# Altium PCB Mic_PCB.PcbDoc
Units mm, origin at the board's own origin, x right, y up, seen from the top; angles counter-clockwise.
Board outline 26.7 x 33.2 mm, 4 copper layers (Top Layer, Internal Plane 1, Internal Plane 2, Bottom Layer), stack 0.462 mm thick; 14 components, 9 nets, 53 pads, 0 vias.
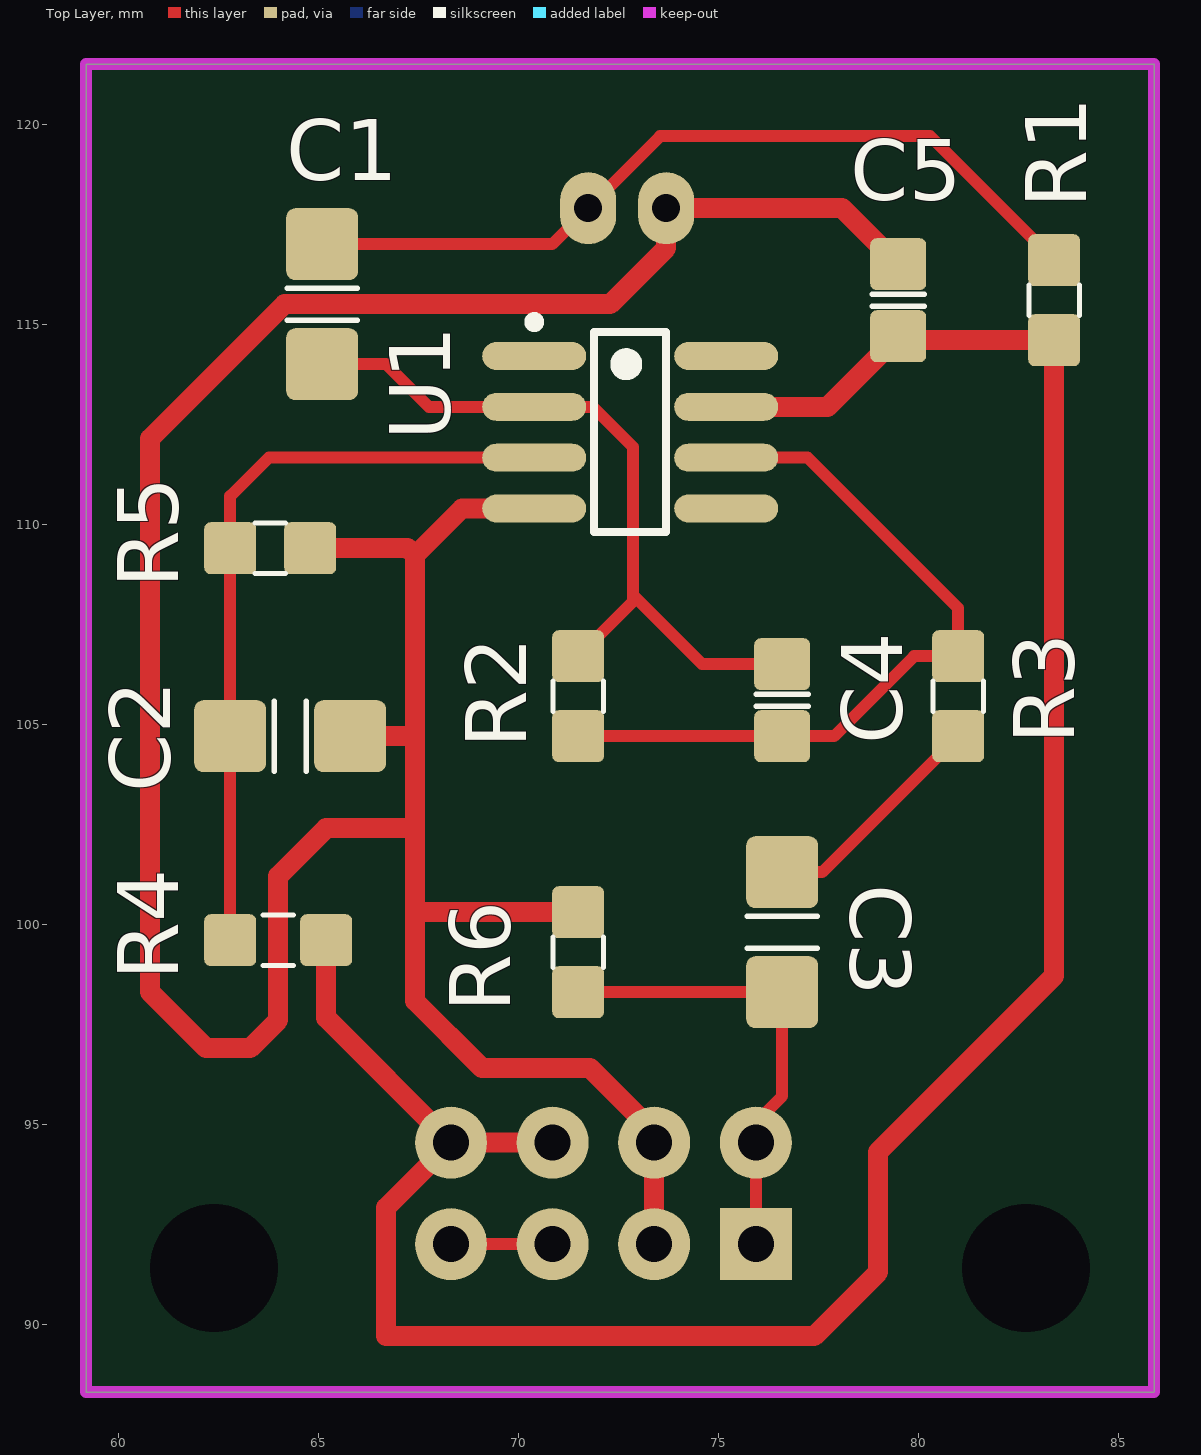
[diagram p0: Top Layer view]
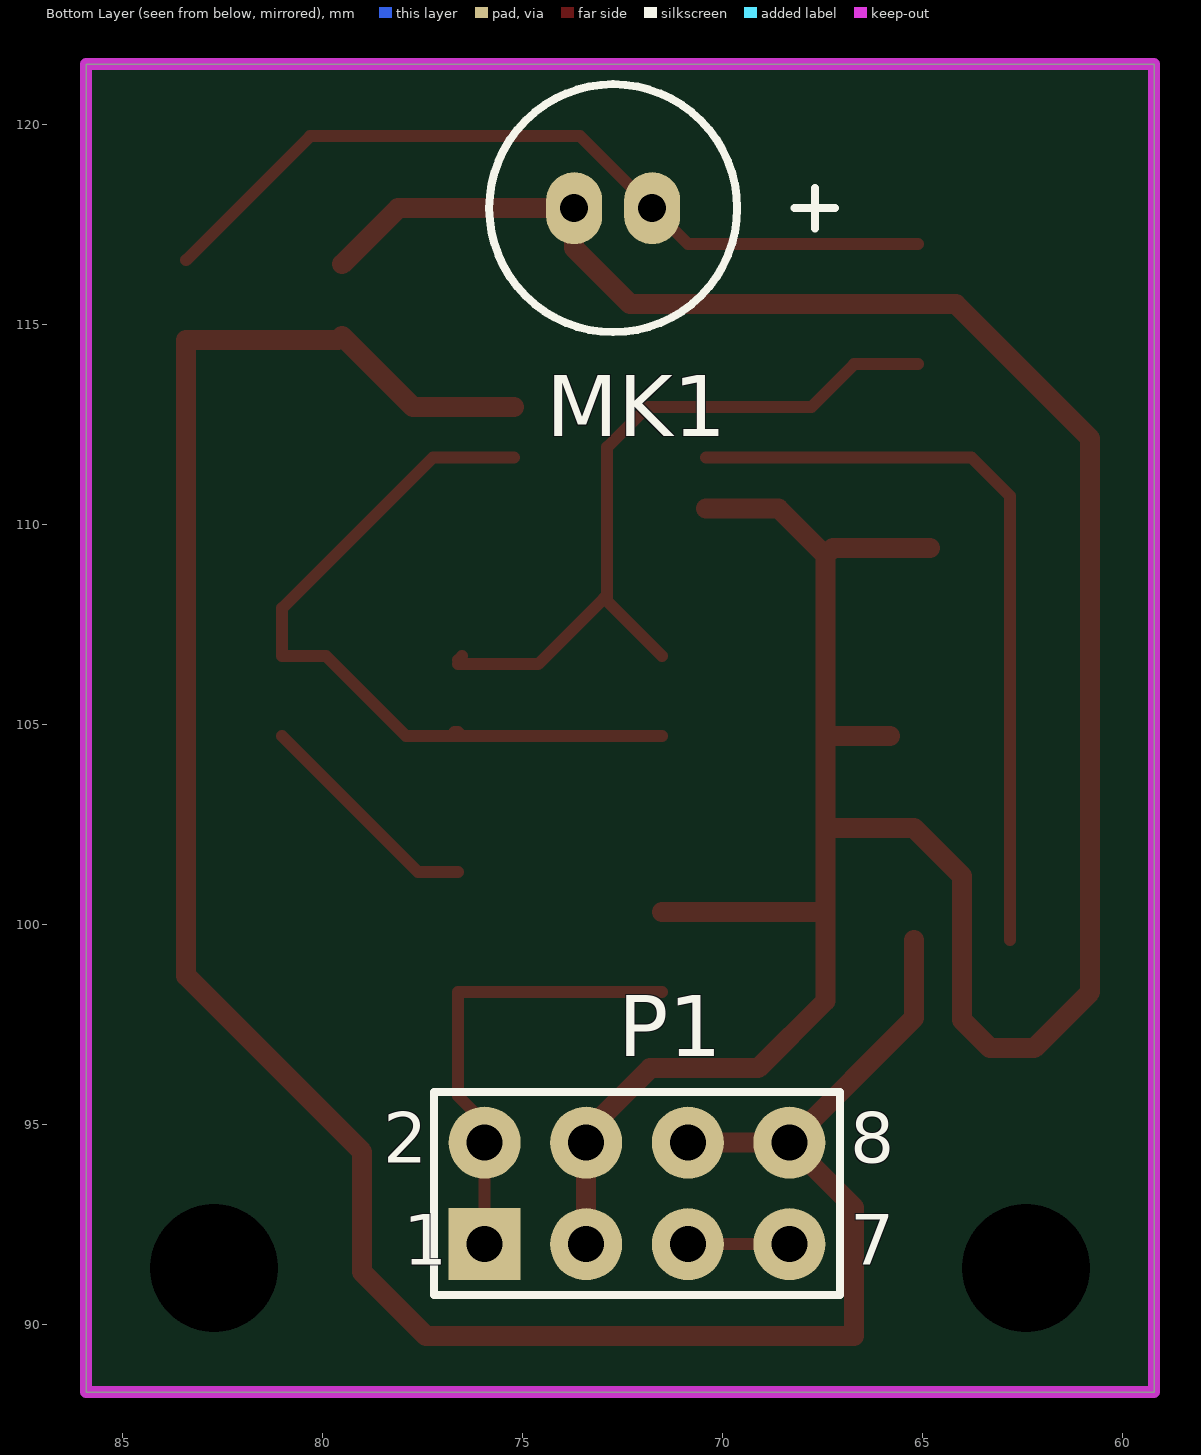
[diagram p1: Bottom Layer view, seen from below]
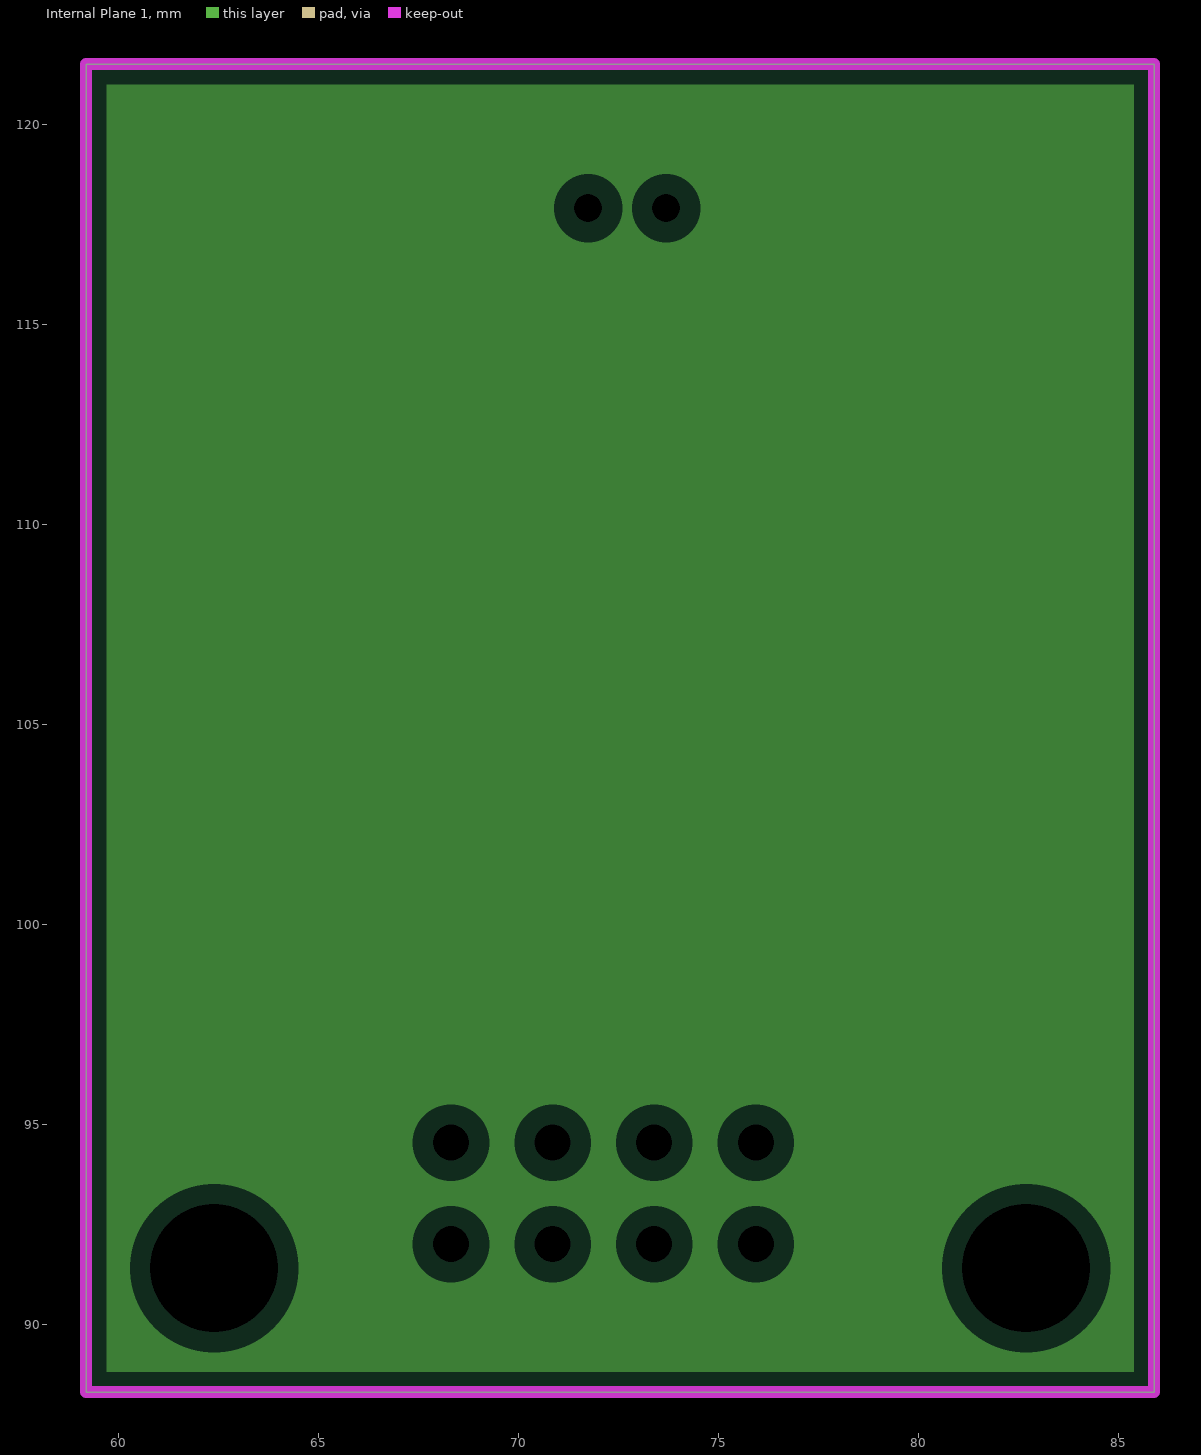
[diagram p2: Internal Plane 1, clearances drawn from the general rule]
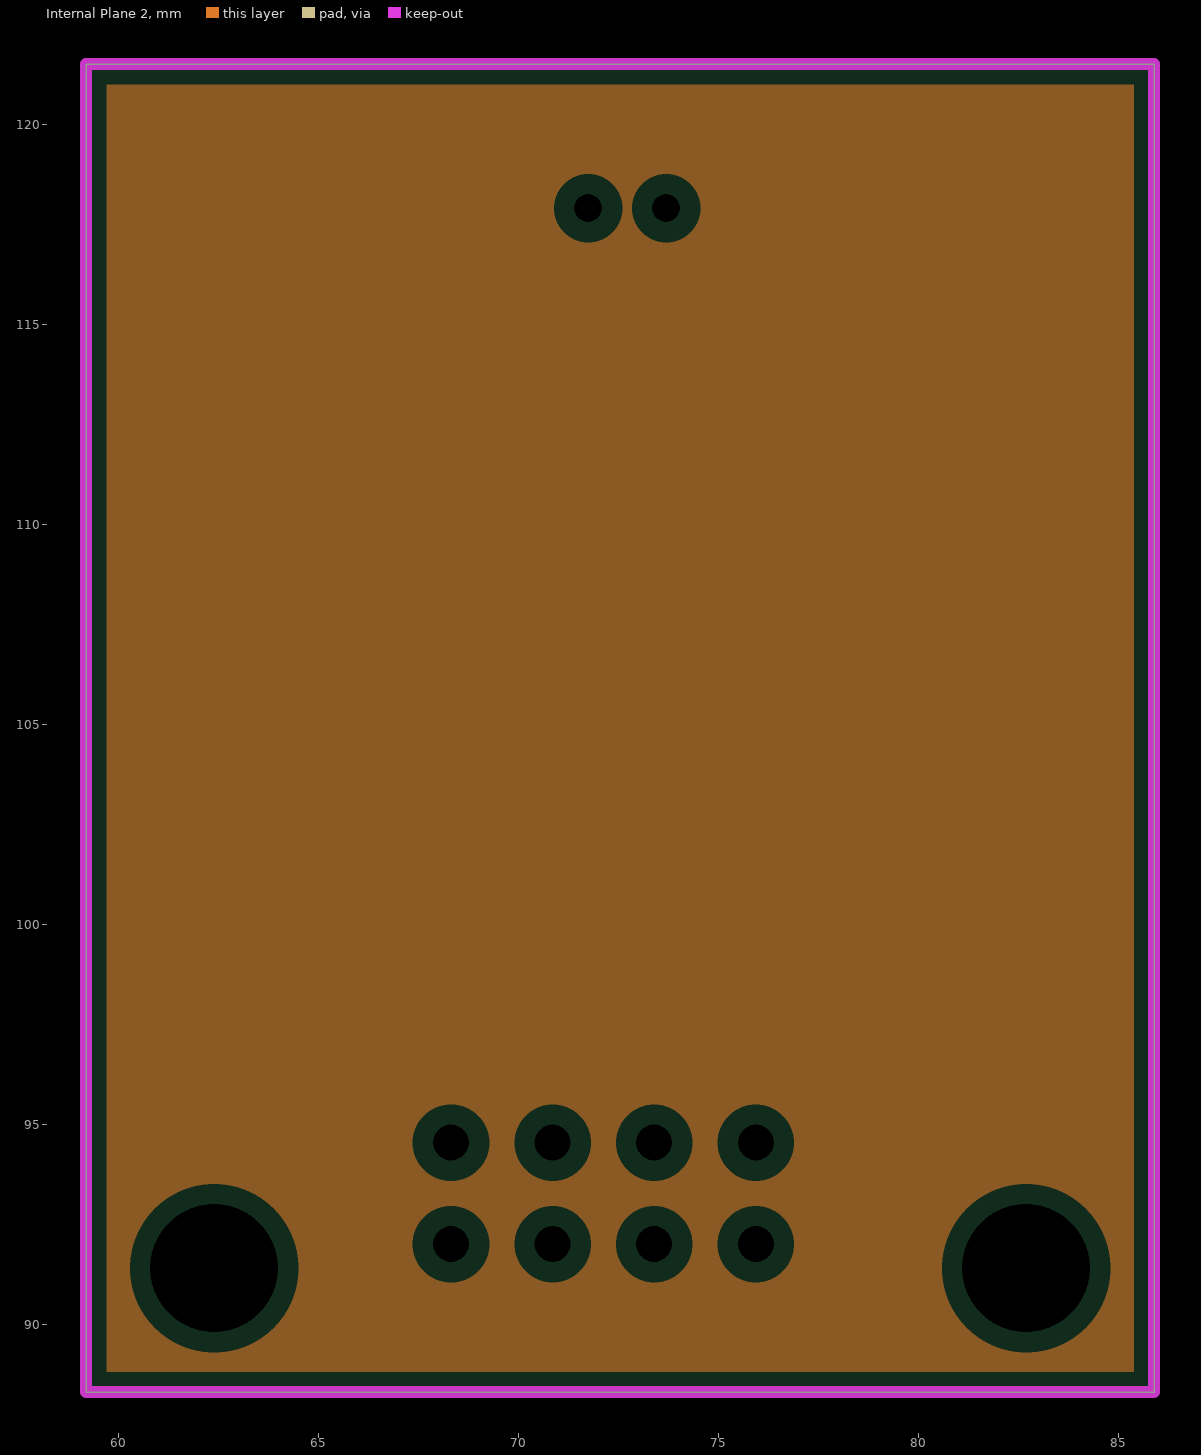
[diagram p3: Internal Plane 2, clearances drawn from the general rule]
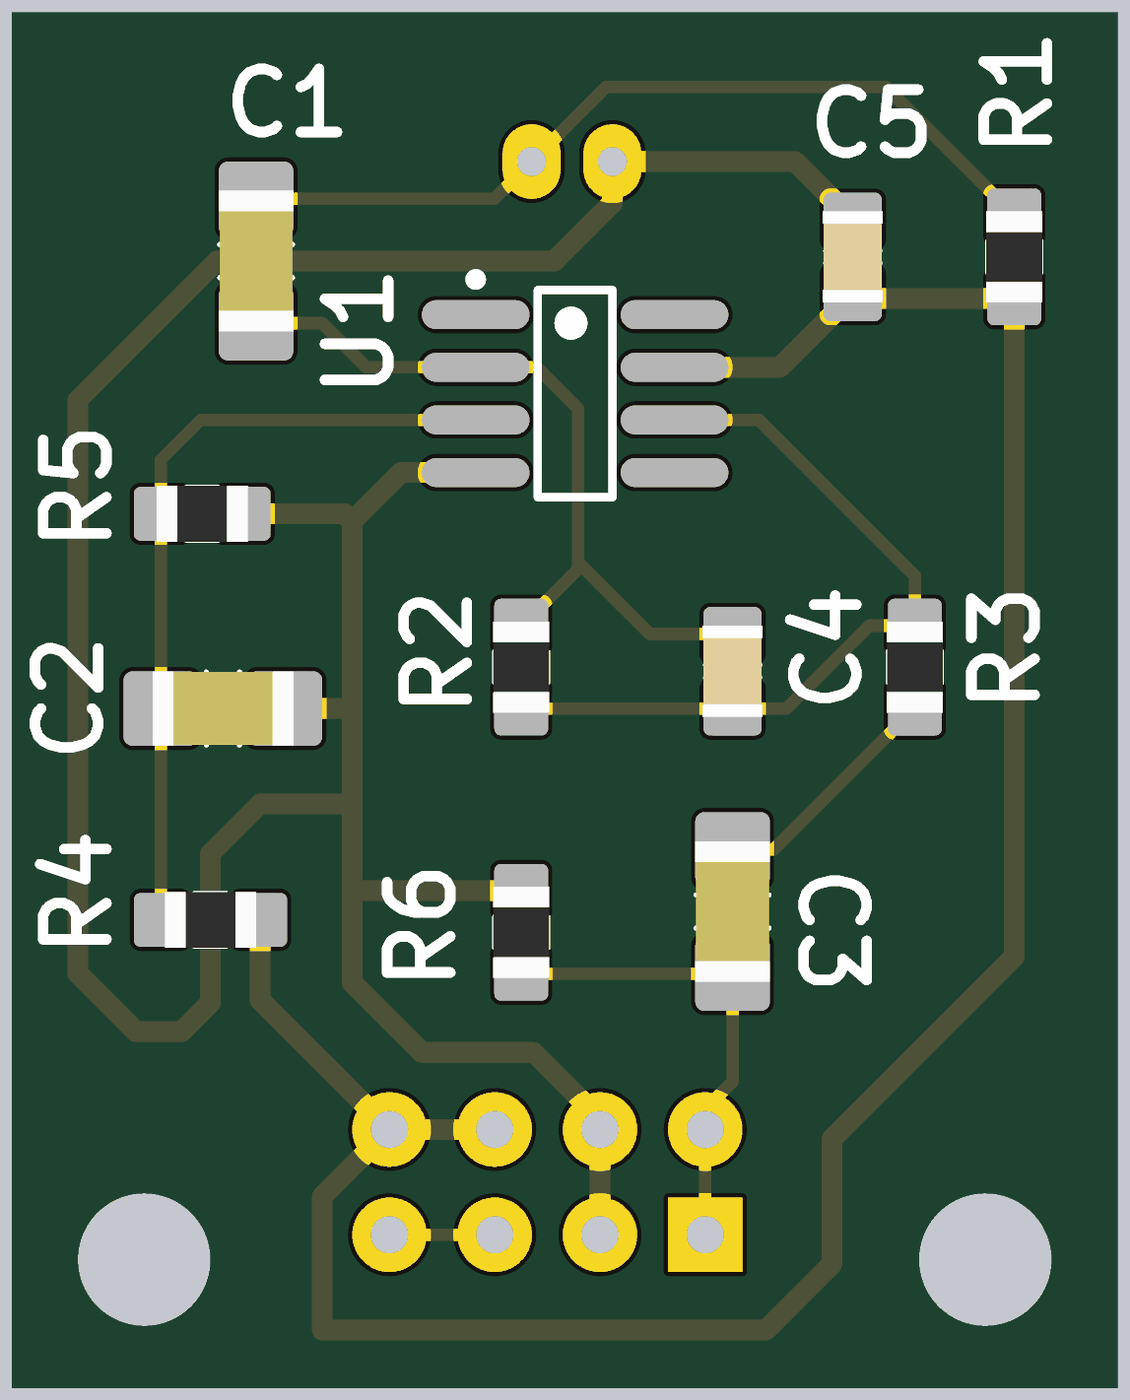
[diagram p4: 3D render of the assembled board from above, using the file's embedded part models]

## Layer stack, top to bottom
Top Solder: solder mask 0.0102, Solder Resist, Dk 3.5
Top Layer: signal copper 0.0356
Internal Plane 1: plane copper 0.0356
Internal Plane 2: plane copper 0.0356
Dielectric 1: dielectric 0.32, FR-4, Dk 4.8
Bottom Layer: signal copper 0.0356
Bottom Solder: solder mask 0.0102, Solder Resist, Dk 3.5

## Board outline
59.2,88.3 59.2,121.5 85.9,121.5 85.9,88.3

## Design rules (kind name [scope] priority, off if disabled: settings)
BoardOutlineClearance [All] p1: gap=0.3
Clearance [All] p1: gap=0.3
HoleSize [All] p1: absolutevalues=TRUE maxlimit=5 minlimit=0.7 maxpercent=80.000 minpercent=20.000
HoleToHoleClearance [All] p1: gap=0.5 allowstackedmicrovias=TRUE
MinimumAnnularRing [All] p1: minimumring=0.3
PlaneClearance [All] p1: clearance=0.508
PlaneConnect [All] p1: planeconnectstyle=Relief reliefexpansion=0.508 reliefentries=4 reliefconductorwidth=0.254 reliefairgap=0.254
PolygonConnect [All] p1: connectstyle=Relief reliefconductorwidth=0.254 reliefentries=4 polygonreliefangle="90 Angle" airgapwidth=0.254
RoutingLayers [All] p1: top layer_v5=TRUE bottom layer_v5=FALSE
RoutingVias [All] p1: holewidth=0.9 width=1.3 viastyle="Blind Buried (Adjacent Layers)" minholewidth=0.711 minwidth=1.27 maxholewidth=0.711 maxwidth=1.27
SilkToSilkClearance [All] p1: silktosilkclearance=0.2
SolderMaskExpansion [All] p1: expansion=0.102
Width [InNet('GND')] p1: maxlimit=0.9 minlimit=0.5 preferedwidth=0.6
Width Width_2 [InNet('VCC_5V')] p2: maxlimit=0.9 minlimit=0.5 preferedwidth=0.6
Width Width_1 [All] p3: maxlimit=0.5 minlimit=0.3 preferedwidth=0.4
24 further rules are at their usual default settings.

## Components (designator, comment, footprint, x,y, rotation, side; value= is the part's Value field where it differs from the comment)
C1 "Cap Pol1" CAPC3216X175N 65.1,115.5 r90 top
C2 "Cap Pol1" CAPC3216X175N 64.3,104.7 r0 top
C3 "Cap Pol1" CAPC3216X175N 76.6,99.8 r270 top
C4 "Cap" CAPC2012X135N 76.6,105.6 r270 top
C5 "Cap" CAPC2012X135N 79.5,115.6 r270 top
MK1 "Mic2" LD-MC-6035P 73.7,117.9 r180 bottom
P1 "Header 4X2" HDR2X4 75.94,92 r180 bottom
R1 "Res1" RESC2012X70N#1 83.4,115.6 r270 top
R2 "Res1" RESC2012X70N#1 71.5,105.7 r90 top
R3 "Res1" RESC2012X70N#1 81,105.7 r90 top
R4 "Res1" RESC2012X70N#2 64,99.6 r180 top
R5 "Res1" RESC2012X70N#1 63.8,109.4 r0 top
R6 "Res1" RESC2012X70N#1 71.5,99.3 r270 top
U1 "NE5534AD" TI-D8_N 72.8,112.3 r0 top

## Footprints (in the part's own frame and the unit in brackets; to place one, negate y for a bottom-side part, rotate by r counter-clockwise, add the part's x,y. Pads: shape width x height; smd on the part's side, far side on the other; paste and mask are expansions set on the pad)
CAPC2012X135N [mm] "Chip Capacitor, Body 2.0x1.2mm, EIA 0805, IPC Medium Density"
  round 0.254 on Mech15: 0(0,0)
  rrect25% 1.3x1.4 smd: 1(-0.9,0) 2(0.9,0)
  Top Layer pour cut-out: -0.675,0.7 -0.475,0.9 0.475,0.9 0.675,0.7 0.675,-0.7 0.475,-0.9 -0.475,-0.9 -0.675,-0.7
  silkscreen extent -0.15,-0.65 0.15,0.65, body extent -1.1,-0.72 1.1,0.73, height 1.34
CAPC3216X175N [mm] "Chip Capacitor, Body 3.2x1.6mm, 1.75mm H, EIA 1206, IPC Medium Density"
  round 0.508 on Mech15: 0(0,0)
  rrect25% 1.8x1.8 smd: 1(-1.5,0) 2(1.5,0)
  silkscreen extent -0.4,-0.88 0.4,0.88, body extent -1.7,-0.9 1.7,0.9, height 1.75
HDR2X4 [mm] "Connector; Header; 4x2 Position"
  rect 1.8x1.8 hole 0.9: 1(0,0)
  round 1.8 hole 0.9: 2(0,2.54) 3(2.54,0) 4(2.54,2.54) 5(5.08,0) 6(5.08,2.54) 7(7.62,0) 8(7.62,2.54)
  silkscreen extent -1.27,-1.27 8.89,3.81
LD-MC-6035P [mm]
  oval 1.4x1.8 hole 0.7: 1(0,0) 2(1.95,0)
  silkscreen extent -2.12,-3.1 6.52,3.1, body extent -2.08,-3.1 4.12,3.1, height 3.5
RESC2012X70N#1 [mm] "Chip Resistor, Body 2.0x1.2mm, EIA 0805, IPC Medium Density"
  round 0.254 on Mech15: 0(0,0)
  rrect25% 1.3x1.3 smd: 1(-1,0) 2(1,0)
  Top Layer pour cut-out: -0.725,0.65 -0.525,0.85 0.525,0.85 0.725,0.65 0.725,-0.65 0.525,-0.85 -0.525,-0.85 -0.725,-0.65
  silkscreen extent -0.38,-0.64 0.38,0.63, body extent -1.1,-0.67 1.1,0.68, height 0.69
RESC2012X70N#2 [mm] "Chip Resistor, Body 2.0x1.2mm, EIA 0805, IPC Medium Density"
  round 0.254 on Mech15: 0(0,0)
  rrect25% 1.3x1.3 smd: 1(-1.2,0) 2(1.2,0)
  Top Layer pour cut-out: -0.725,0.65 -0.525,0.85 0.525,0.85 0.725,0.65 0.725,-0.65 0.525,-0.85 -0.525,-0.85 -0.725,-0.65
  silkscreen extent -0.38,-0.64 0.38,0.63, body extent -1.1,-0.67 1.1,0.68, height 0.69
TI-D8_N [mm] "SOIC, 8-Leads, Body 4.9x3.9mm, Pitch 1.27mm, IPC Medium Density"
  oval 2.6x0.7 smd: 1(-2.4,1.905) 2(-2.4,0.635) 3(-2.4,-0.635) 4(-2.4,-1.905) 5(2.4,-1.905) 6(2.4,-0.635) 7(2.4,0.635) 8(2.4,1.905)
  silkscreen extent -2.52,-2.5 0.9,2.88, body extent -2,-2.5 2,2.5, height 1.75

## Part data
C1 C2 C3: "Polarized Capacitor (Radial)"
C4 C5: "Capacitor"
MK1: "Microphone"
P1: "Header, 4-Pin, Dual row"
R1 R2 R3 R4 R5 R6: "Resistor"
U1: "Low-Noise Operational Amplifier, 10 to 30 V, 0 to 70 degC, 8-pin SOIC (D8), Green (RoHS & no Sb/Br)"

## Free pads (board coordinates)
  round 0 hole 3.2 unplated: 1(62.4,91.4) 2(82.7,91.4)

## Nets (pads, with @x,y where several pads share a name; then routed paths per layer and width w, separated by ;. In a path a pad name is that pad's centre, name@x,y a point inside that pad or via, vN(x,y) a via of type N, cw(c..) or ccw(c..) an arc to the next point about the centre after c; other vN are vias at no path point)
GND: C2.2 C5.1 MK1.1 P1.3 P1.4 R5.2 R6.1 U1.4 | length 80.8
  Top Layer w0.5: R5.2 67.235,109.4 67.417,109.217 ; C2.2 67.417,104.7 ; U1.4 68.595,110.395 67.417,109.217 ; R6.1 67.417,100.3 ; P1.3 P1.4 73.4,94.8 71.8,96.4 69.1,96.4 67.417,98.083 67.417,100.3 ; C5.1 78.1,117.9 MK1.1 73.7,116.9 72.3,115.5 64.154,115.5 60.8,112.146 60.8,98.3 62.2,96.9 63.3,96.9 64,97.6 64,101.2 65.2,102.4 67.417,102.4 ; 67.417,100.3 67.417,102.4 ; 67.417,102.4 67.417,103.3 67.417,104.7 67.417,107.4 67.417,109.217
NetC1_1: C1.1 C4.1 R2.2 U1.2 | length 18.9
  Top Layer w0.3: C1.1 66.7,114 67.765,112.935 U1.2 71.865,112.935 72.875,111.925 72.875,108.075 R2.2 ; 72.95,108.15 74.6,106.5 C4.1 ; C4.1@76.5,106.7 C4.1@76.6,106.6
NetC1_2: C1.2 MK1.2 R1.1 | length 20.7
  Top Layer w0.3: C1.2 70.85,117 MK1.2 73.55,119.7 80.3,119.7 R1.1
NetC2_1: C2.1 R4.2 R5.1 U1.3 | length 19.1
  Top Layer w0.3: R4.2 C2.1 R5.1 62.8,110.7 63.765,111.665 U1.3
NetC3_1: C3.1 R3.1 | length 5.8
  Top Layer w0.3: C3.1 77.6,101.3 R3.1
NetC4_2: C4.2 R2.1 R3.2 U1.6 | length 19.1
  Top Layer w0.3: R2.1 C4.2 77.9,104.7 79.9,106.7 R3.2 81,107.9 77.235,111.665 U1.6 ; C4.2@76.5,104.7 76.6,104.8 C4.2@76.691,104.8
NetP1_5: P1.5 P1.7 | length 2.5
  Top Layer w0.3: P1.7 P1.5
SIGNAL_OUT: C3.2 P1.1 P1.2 R6.2 | length 11.7
  Top Layer w0.3: R6.2 C3.2 76.6,95.7 75.94,95.04 P1.2 P1.1
VCC_5V: C5.2 P1.6 P1.8 R1.2 R4.1 U1.7 | length 61.5
  Top Layer w0.5: R4.1 65.2,97.66 P1.8 ; P1.6 P1.8 ; U1.7 77.735,112.935 C5.2 79.6,114.6 R1.2 83.4,98.709 79,94.309 79,91.3 77.4,89.7 66.7,89.7 66.7,92.92 P1.8
pads on no net: C1.0 C2.0 C3.0 C4.0 C5.0 R1.0 R2.0 R3.0 R4.0 R5.0 R6.0 U1.1 U1.5 U1.8

## Keep-outs
Keep-Out Layer:
  the board outline again, w0.3

## Silkscreen, mask and mechanical layers (free items; w line width, h text height)
Mechanical 3:
  region: 73.8,112.475 76.6,112.475 76.6,112.125 73.8,112.125
  region: 73.8,111.2 76.6,111.2 76.6,110.875 73.8,110.875
  region: 73.8,113.75 76.6,113.75 76.6,113.4 73.8,113.4
  region: 69,113.725 71.8,113.725 71.8,113.4 69,113.4
  region: 69,112.475 71.8,112.475 71.8,112.125 69,112.125
  region: 69,111.2 71.8,111.2 71.8,110.875 69,110.875
Drill Drawing:
  text ".LEGEND" at 95.88,81.28 h1.52
  text "Drill Drawing." at 95.88,78.74 h1.52

## Dimensions
59.2,88.3 to 85.9,88.3 on Mechanical 1
59.2,88.3 to 59.2,121.5 on Mechanical 1

## Text inside footprints (layer, text, board x,y; h text height)
P1: Bottom Overlay "2" at 78.48,94.032 h1.27; Bottom Overlay "1" at 77.972,91.492 h1.27; Bottom Overlay "7" at 66.796,91.492 h1.27; Bottom Overlay "8" at 66.796,94.032 h1.27